# EAGLE board CT_schematic (EAGLE 7.6.0)

Size 100 x 80 mm. Coordinates in mm from the lower left corner, seen from the top.
Outline: 0,0 100,0 100,80 0,80 0,0
Copper layers (1*16): Top 0.035mm / dielectric 1.5mm / Bottom 0.035mm
Design rules "default": minimum track width 10mil, minimum drill 24mil, track to track 8mil, track to pad 8mil, pad to pad 8mil, via to via 8mil, smd to smd 8mil, copper to edge 40mil, drill to drill 8mil, minimum pad ring 10mil, minimum via ring 8mil, stop-mask expansion 4mil, vias tented up to drill 0mil, thermal gap 10mil

## Footprints (pad centres in the part's own frame; a part is rotated, then mirrored left to right if it is on the bottom)
C0603 = smd 0.8 x 0.8: 1 -0.762,0; 2 0.762,0
C0402 = smd 0.5 x 0.5: 1 -0.508,0; 2 0.508,0
C0805 = smd 1.2 x 1.3: 1 -1.016,0; 2 1.016,0
C1206 = smd 1.3 x 1.6: 1 -1.524,0; 2 1.524,0
L0603 = smd 0.8 x 0.8: 1 -0.762,0; 2 0.762,0
DR1040 = smd 1.6 x 3.2: 1 -4.458,0; 2 4.458,0
R0603 = smd 0.8 x 0.8: 1 -0.762,0; 2 0.762,0
WLCSP168 = smd 0.2 x 0.2: A1 -2.2,2.6; A2 -1.8,2.6; A3 -1.4,2.6; A4 -1,2.6; A5 -0.6,2.6; A6 -0.2,2.6; A7 0.2,2.6; A8 0.6,2.6; A9 1,2.6; A10 1.4,2.6; A11 1.8,2.6; A12 2.2,2.6; B1 -2.2,2.2; B2 -1.8,2.2; B3 -1.4,2.2; B4 -1,2.2; B5 -0.6,2.2; B6 -0.2,2.2; B7 0.2,2.2; B8 0.6,2.2; B9 1,2.2; B10 1.4,2.2; B11 1.8,2.2; B12 2.2,2.2; C1 -2.2,1.8; C2 -1.8,1.8; C3 -1.4,1.8; C4 -1,1.8; C5 -0.6,1.8; C6 -0.2,1.8; C7 0.2,1.8; C8 0.6,1.8; C9 1,1.8; C10 1.4,1.8; C11 1.8,1.8; C12 2.2,1.8; D1 -2.2,1.4; D2 -1.8,1.4; D3 -1.4,1.4; D4 -1,1.4; D5 -0.6,1.4; D6 -0.2,1.4; D7 0.2,1.4; D8 0.6,1.4; D9 1,1.4; D10 1.4,1.4; D11 1.8,1.4; D12 2.2,1.4; E1 -2.2,1; E2 -1.8,1; E3 -1.4,1; E4 -1,1; E5 -0.6,1; E6 -0.2,1; E7 0.2,1; E8 0.6,1; E9 1,1; E10 1.4,1; E11 1.8,1; E12 2.2,1; F1 -2.2,0.6; F2 -1.8,0.6; F3 -1.4,0.6; F4 -1,0.6; F5 -0.6,0.6; F6 -0.2,0.6; F7 0.2,0.6; F8 0.6,0.6; F9 1,0.6; F10 1.4,0.6; F11 1.8,0.6; F12 2.2,0.6; G1 -2.2,0.2; G2 -1.8,0.2; G3 -1.4,0.2; G4 -1,0.2; G5 -0.6,0.2; G6 -0.2,0.2; G7 0.2,0.2; G8 0.6,0.2; G9 1,0.2; G10 1.4,0.2; G11 1.8,0.2; G12 2.2,0.2; H1 -2.2,-0.2; H2 -1.8,-0.2; H3 -1.4,-0.2; H4 -1,-0.2; H5 -0.6,-0.2; H6 -0.2,-0.2; H7 0.2,-0.2; H8 0.6,-0.2; H9 1,-0.2; H10 1.4,-0.2; H11 1.8,-0.2; H12 2.2,-0.2; J1 -2.2,-0.6; J2 -1.8,-0.6; J3 -1.4,-0.6; J4 -1,-0.6; J5 -0.6,-0.6; J6 -0.2,-0.6; J7 0.2,-0.6; J8 0.6,-0.6; J9 1,-0.6; J10 1.4,-0.6; J11 1.8,-0.6; J12 2.2,-0.6; K1 -2.2,-1; K2 -1.8,-1; K3 -1.4,-1; K4 -1,-1; K5 -0.6,-1; K6 -0.2,-1; K7 0.2,-1; K8 0.6,-1; K9 1,-1; K10 1.4,-1; K11 1.8,-1; K12 2.2,-1; L1 -2.2,-1.4; L2 -1.8,-1.4; L3 -1.4,-1.4; L4 -1,-1.4; L5 -0.6,-1.4; L6 -0.2,-1.4; L7 0.2,-1.4; L8 0.6,-1.4; L9 1,-1.4; L10 1.4,-1.4; L11 1.8,-1.4; L12 2.2,-1.4; M1 -2.2,-1.8; M2 -1.8,-1.8; M3 -1.4,-1.8; M4 -1,-1.8; M5 -0.6,-1.8; M6 -0.2,-1.8; M7 0.2,-1.8; M8 0.6,-1.8; M9 1,-1.8; M10 1.4,-1.8; M11 1.8,-1.8; M12 2.2,-1.8; N1 -2.2,-2.2; N2 -1.8,-2.2; N3 -1.4,-2.2; N4 -1,-2.2; N5 -0.6,-2.2; N6 -0.2,-2.2; N7 0.2,-2.2; N8 0.6,-2.2; N9 1,-2.2; N10 1.4,-2.2; N11 1.8,-2.2; N12 2.2,-2.2; P1 -2.2,-2.6; P2 -1.8,-2.6; P3 -1.4,-2.6; P4 -1,-2.6; P5 -0.6,-2.6; P6 -0.2,-2.6; P7 0.2,-2.6; P8 0.6,-2.6; P9 1,-2.6; P10 1.4,-2.6; P11 1.8,-2.6; P12 2.2,-2.6
DFN8-S = smd 0.6 x 0.4: 1 -2.69,1.905; 2 -2.69,0.635; 3 -2.69,-0.635; 4 -2.69,-1.905; 5 2.69,-1.905; 6 2.69,-0.635; 7 2.69,0.635; 8 2.69,1.905
VFBGA-63 = smd 0.4 x 0.4: A1 -3.6,4.4; A2 -2.8,4.4; A9 2.8,4.4; A10 3.6,4.4; B1 -3.6,3.6; B9 2.8,3.6; B10 3.6,3.6; C3 -2,2.8; C4 -1.2,2.8; C5 -0.4,2.8; C6 0.4,2.8; C7 1.2,2.8; C8 2,2.8; D3 -2,2; D4 -1.2,2; D5 -0.4,2; D6 0.4,2; D7 1.2,2; D8 2,2; E3 -2,1.2; E4 -1.2,1.2; E5 -0.4,1.2; E6 0.4,1.2; E7 1.2,1.2; E8 2,1.2; F3 -2,0.4; F4 -1.2,0.4; F5 -0.4,0.4; F6 0.4,0.4; F7 1.2,0.4; F8 2,0.4; G3 -2,-0.4; G4 -1.2,-0.4; G5 -0.4,-0.4; G6 0.4,-0.4; G7 1.2,-0.4; G8 2,-0.4; H3 -2,-1.2; H4 -1.2,-1.2; H5 -0.4,-1.2; H6 0.4,-1.2; H7 1.2,-1.2; H8 2,-1.2; J3 -2,-2; J4 -1.2,-2; J5 -0.4,-2; J6 0.4,-2; J7 1.2,-2; J8 2,-2; K3 -2,-2.8; K4 -1.2,-2.8; K5 -0.4,-2.8; K6 0.4,-2.8; K7 1.2,-2.8; K8 2,-2.8; L1 -3.6,-3.6; L2 -2.8,-3.6; L9 2.8,-3.6; L10 3.6,-3.6; M1 -3.6,-4.4; M2 -2.8,-4.4; M9 2.8,-4.4; M10 3.6,-4.4
FCI_10118193-0001LF = smd 0.4 x 1.35: 1 -1.3,2.675; 2 -0.65,2.675; 3 0,2.675; 4 0.65,2.675; 5 1.3,2.675 | smd 1.6 x 1.4: 6 -3.2,2.45; 7 3.2,2.45 | smd 1.9 x 1.9: 8 -1.2,0; 9 1.2,0 | hole 0.5: -3.3,0; 3.3,0
SOT143B = smd 1 x 0.7: 1 -0.75,-1 | smd 0.6 x 0.7: 2 0.95,-1; 3 0.95,1; 4 -0.95,1
ABS07-32.768KHZ-7-T = smd 1.1 x 2.4: 1 -2.5,0; 2 0,0
ASFL1 = smd 1.7 x 1.5: 1 -1.27,-1.1; 2 1.27,-1.1; 3 1.27,1.1; 4 -1.27,1.1
TSOT-23-5 = smd 1.3 x 0.62: 1 -1.31,0.95; 2 -1.31,0; 3 -1.31,-0.95; 4 1.31,-0.95; 5 1.31,0.95
DFN8_2X3MC = smd 0.813 x 0.305: 1 -1.398,0.75; 2 -1.398,0.25; 3 -1.398,-0.25; 4 -1.398,-0.75; 5 1.398,-0.75; 6 1.398,-0.25; 7 1.398,0.25; 8 1.398,0.75 | smd 1.753 x 1.549: 9 0,0
JST-2-SMD = smd 1 x 4.6: 1 -1,-3.7; 2 1,-3.7 | smd 1.6 x 3.4: NC1 -3.4,1.5; NC2 3.4,1.5
SON-6 = smd 0.55 x 0.3: 1 -0.355,0.5 | smd 0.52 x 0.3: 2 -0.37,0; 3 -0.37,-0.5; 4 0.37,-0.5; 5 0.37,0; 6 0.37,0.5
SW_4-1437565-2 = smd 1.4 x 2.1: 1 -2.23,4.55; 2 -2.23,-4.55; 3 2.23,4.55; 4 2.23,-4.55
LGM67K-G1J2-24-Z = smd 0.8 x 1.4: A -2,0; C 0,0
NC7SZ125M5X = smd 1.3 x 0.7: 1 -1.3,0.95; 2 -1.3,0; 3 -1.3,-0.95; 4 1.3,-0.95; 5 1.3,0.95
DUMMY_PACKAGE_165 = drill 0.3: 1 0,-1; 2 1.5,-1; 3 3,-1

## Placement (x,y rotation side)
C1  1e-06  [C0603]  -64.77,48.26 0 top  (outside the outline)
C2  1e-07  [C0603]  -15.24,53.34 0 top  (outside the outline)
C3  1e-07  [C0603]  -19.05,53.34 0 top  (outside the outline)
C4  1e-07  [C0603]  -22.86,53.34 0 top  (outside the outline)
C5  1e-07  [C0603]  -26.67,53.34 0 top  (outside the outline)
C6  1e-07  [C0603]  -30.48,53.34 0 top  (outside the outline)
C7  1e-07  [C0603]  -34.29,53.34 0 top  (outside the outline)
C8  1e-07  [C0603]  -38.1,53.34 0 top  (outside the outline)
C9  1e-07  [C0603]  -41.91,53.34 0 top  (outside the outline)
C10  1e-07  [C0603]  -45.72,53.34 0 top  (outside the outline)
C11  1e-07  [C0603]  -49.53,53.34 0 top  (outside the outline)
C12  4.7e-06  [C0603]  -49.53,48.26 0 top  (outside the outline)
C13  2.2e-06  [C0603]  -53.34,48.26 0 top  (outside the outline)
C14  2.2e-06  [C0603]  -57.15,48.26 0 top  (outside the outline)
C15  1e-08  [C0603]  -53.34,53.34 0 top  (outside the outline)
C16  1e-06  [C0603]  -57.15,53.34 0 top  (outside the outline)
C17  1e-07  [C0603]  -60.96,53.34 0 top  (outside the outline)
C18  1e-11  [C0402]  -41.91,58.42 0 top  (outside the outline)
C19  1e-11  [C0402]  -45.72,58.42 0 top  (outside the outline)
C20  1e-06  [C0603]  -64.77,53.34 0 top  (outside the outline)
C21  1e-08  [C0402]  -49.53,58.42 0 top  (outside the outline)
C22  1e-07  [C0402]  -53.34,58.42 0 top  (outside the outline)
C23  1e-07  [C0402]  -57.15,58.42 0 top  (outside the outline)
C24  1e-07  [C0402]  -60.96,58.42 0 top  (outside the outline)
C25  1e-07  [C0402]  -64.77,58.42 0 top  (outside the outline)
C26  2.2e-06  [C0603]  -60.96,48.26 0 top  (outside the outline)
C27  1e-08  [C0402]  -15.24,63.5 0 top  (outside the outline)
C28  1e-05  [C0805]  -46.99,36.83 0 top  (outside the outline)
C29  1e-05  [C0805]  -52.07,36.83 0 top  (outside the outline)
C30  1e-07  [C0402]  -19.05,63.5 0 top  (outside the outline)
C31  1e-05  [C1206]  -29.21,36.83 0 top  (outside the outline)
C32  1e-05  [C1206]  -35.56,36.83 0 top  (outside the outline)
C33  1e-08  [C0402]  -22.86,63.5 0 top  (outside the outline)
F1  240.0  [L0603]  -15.24,58.42 0 top  (outside the outline)
I1  2.5e-06  [DR1040]  -48.26,6.35 0 top  (outside the outline)
R2  1000.0  [R0603]  -19.05,58.42 0 top  (outside the outline)
R4  4700.0  [R0603]  -22.86,58.42 0 top  (outside the outline)
R5  2200.0  [R0603]  -26.67,58.42 0 top  (outside the outline)
R6  2200.0  [R0603]  -30.48,58.42 0 top  (outside the outline)
R7  10000.0  [R0603]  -30.48,43.18 0 top  (outside the outline)
R8  10000.0  [R0603]  -35.56,43.18 0 top  (outside the outline)
R9  10000.0  [R0603]  -40.64,43.18 0 top  (outside the outline)
R10  10000.0  [R0603]  -45.72,43.18 0 top  (outside the outline)
R11  10000.0  [R0603]  -50.8,43.18 0 top  (outside the outline)
R12  10000.0  [R0603]  -55.88,43.18 0 top  (outside the outline)
R13  10000.0  [R0603]  -60.96,43.18 0 top  (outside the outline)
R14  10000.0  [R0603]  -15.24,48.26 0 top  (outside the outline)
R15  10000.0  [R0603]  -20.32,48.26 0 top  (outside the outline)
R16  10000.0  [R0603]  -25.4,48.26 0 top  (outside the outline)
R17  10000.0  [R0603]  -30.48,48.26 0 top  (outside the outline)
R18  220000.0  [R0603]  -15.24,43.18 0 top  (outside the outline)
R19  1000000.0  [R0603]  -64.77,35.56 0 top  (outside the outline)
R20  10000.0  [R0603]  -35.56,48.26 0 top  (outside the outline)
R21  10000.0  [R0603]  -40.64,48.26 0 top  (outside the outline)
R22  9100.0  [R0603]  -34.29,58.42 0 top  (outside the outline)
R23  680000.0  [R0603]  -20.32,43.18 0 top  (outside the outline)
R24  120000.0  [R0603]  -25.4,43.18 0 top  (outside the outline)
R25  2000.0  [R0603]  -38.1,58.42 0 top  (outside the outline)
R26  10000.0  [R0603]  -45.72,48.26 0 top  (outside the outline)
U1  STM32F469AIY6TR  [WLCSP168]  -26.67,19.05 0 top  (outside the outline)
U2  24AA512-I/MF  [DFN8-S]  -55.88,19.05 0 top  (outside the outline)
U3  mt29f4g08abadah4  [VFBGA-63]  -17.78,6.35 0 top  (outside the outline)
U4  10118193-0001LF  [FCI_10118193-0001LF]  -35.56,27.94 0 top  (outside the outline)
U5  prtr5v0u2ax  [SOT143B]  -35.56,63.5 0 top  (outside the outline)
U6  ABS07-32.768KHZ-7-T  [ABS07-32.768KHZ-7-T]  -55.88,27.94 0 top  (outside the outline)
U7  ASFL1-25MHZ-NCS  [ASFL1]  -26.67,29.21 0 top  (outside the outline)
U8  ltc3406es5  [TSOT-23-5]  -57.15,35.56 0 top  (outside the outline)
U9  MCP73831T-2ACI/MC  [DFN8_2X3MC]  -50.8,62.23 0 top  (outside the outline)
U10  S2B-PH-SM4-TB(LF)(SN)  [JST-2-SMD]  -40.64,19.05 0 top  (outside the outline)
U11  TPS3895ADRYR  [SON-6]  -44.45,62.23 0 top  (outside the outline)
U12  4-1437565-2  [SW_4-1437565-2]  -38.1,6.35 0 top  (outside the outline)
U13  Q65110A2395  [LGM67K-G1J2-24-Z]  -17.78,36.83 0 top  (outside the outline)
U14  nc7sz125m5x  [NC7SZ125M5X]  -40.64,35.56 0 top  (outside the outline)
U15  Dummy  [DUMMY_PACKAGE_165]  -41.91,63.5 0 top  (outside the outline)

## Library data of the parts
C1-C33 F1 I1 R2 R4-R26 U1-U15 = circuit_tree

## Nets
CLK_CRYSTAL_U1_E11: C18.1 U1.E11 U6.1
CLK_CRYSTAL_U1_E12: C19.1 U1.E12 U6.2
CLK_U1_K11: U1.K11 U7.3
GND: C1.2 C2.2 C3.2 C4.2 C5.2 C6.2 C7.2 C8.2 C9.2 C10.2 C11.2 C12.2 C13.2 C14.2 C15.2 C16.2 C17.2 C18.2 C19.2 C20.2 C21.2 C22.2 C23.2 C24.2 C25.2 C26.2 C27.2 C28.2 C29.1 C29.2 C30.2 C31.2 C32.2 C33.2 R2.2 R9.2 R10.2 R11.2 R18.2 R22.2 R24.2 R25.2 U1.A4 U1.B7 U1.B10 U1.C1 U1.F2 U1.F7 U1.F12 U1.H1 U1.H7 U1.J11 U1.L11 U1.M1 U1.N8 U1.N11 U1.P4 U2.4 U3.C5 U3.F7 U3.K3 U3.K8 U4.5 U4.6 U4.7 U4.8 U4.9 U5.1 U7.2 U8.2 U9.6 U9.9 U10.2 U11.2 U13.C U14.1 U14.3 U15.1
INPUT_USBPOWER_5V: C20.1 C31.1 R26.2 U1.E2 U4.1 U5.4 U9.1 U9.2
NET_U1_A9: R6.1 U1.A9 U2.5
NET_U1_B9: R5.1 U1.B9 U2.6
NET_U1_D2: C14.1 U1.D2
NET_U1_D9: R7.1 U1.D9
NET_U1_F8: R8.1 U1.F8
NET_U1_H9: R4.1 U1.H9 U14.4
NET_U1_K1: U1.K1
NET_U1_K2: U1.K2
NET_U1_M12: C15.1 C16.1 F1.1 U1.M12
NET_U1_N4: C13.1 U1.N4
NET_U1_P9: R9.1 U1.P9
NET_U1_P10: U13.A
NET_U1_P11: U12.3 U12.4
NET_U2_1: R10.1 U2.1
NET_U2_2: R11.1 U2.2
NET_U2_3: R12.1 U2.3
NET_U3_C3: R17.1 U3.C3
NET_U8_1: U8.1
NET_U8_3: I1.1 U8.3
NET_U8_5: R18.1 R19.1 U8.5
NET_U8_ATNET_3: I1.2 R19.2
NET_U9_5: R26.1 U9.5
NET_U9_8: R25.1 U9.8
NET_U11_1: R21.1 R22.1 U11.1
NET_U11_3: R23.2 R24.1 U11.3
NET_U11_4: R20.1 U11.4 U14.2
NET_U12_1: R2.1 U12.1 U12.2
PROC_ADC1_IN3: U1.N10 U15.2
PROC_ADC1_IN4: U1.M9 U15.3
PROC_FMC_A16: U1.J4 U3.D5
PROC_FMC_A17: U1.M2 U3.C4
PROC_FMC_D0: U1.L3 U3.H4
PROC_FMC_D1: U1.L2 U3.J4
PROC_FMC_D2: U1.E6 U3.K4
PROC_FMC_D3: U1.A3 U3.K5
PROC_FMC_D4: U1.N7 U3.K6
PROC_FMC_D5: U1.M7 U3.J7
PROC_FMC_D6: U1.K6 U3.K7
PROC_FMC_D7: U1.P6 U3.J8
PROC_FMC_INT: R13.1 U1.H6 U3.C8
PROC_FMC_NCE: R14.1 U1.D7 U3.C6
PROC_FMC_NOE: R16.1 U1.B4 U3.D4
PROC_FMC_NWE: R15.1 U1.C6 U3.C7
PROC_USB_OTG_FS_DM: U1.F7 U4.2 U5.3
PROC_USB_OTG_FS_DP: U1.F6 U4.3 U5.2
VCC_S1_3V7: C28.1 C32.1 U8.4 U9.3 U9.4 U10.1
VCC_TIER1_3V3: C1.1 C2.1 C3.1 C4.1 C5.1 C6.1 C7.1 C8.1 C9.1 C10.1 C11.1 C12.1 C17.1 C21.1 C22.1 C23.1 C24.1 C25.1 C26.1 C27.1 C29.2 C30.1 C33.1 F1.2 I1.2 R4.2 R5.2 R6.2 R7.2 R8.2 R12.2 R13.2 R14.2 R15.2 R16.2 R17.2 R19.2 R20.2 R21.2 R23.1 U1.A7 U1.A11 U1.B5 U1.C2 U1.C12 U1.F1 U1.G11 U1.J12 U1.L1 U1.P3 U1.P8 U1.P12 U2.7 U2.8 U3.D3 U3.G4 U3.H8 U3.J6 U7.4 U11.6 U14.5

## Tracks (layer width: path | path; a pad name or v marks a point on that pad's centre or on a via)
CLK_CRYSTAL_U1_E11  (2 unrouted)
CLK_CRYSTAL_U1_E12  (2 unrouted)
CLK_U1_K11  (1 unrouted)
GND  (77 unrouted)
INPUT_USBPOWER_5V  (7 unrouted)
NET_U1_A9  (2 unrouted)
NET_U1_B9  (2 unrouted)
NET_U1_D2  (1 unrouted)
NET_U1_D9  (1 unrouted)
NET_U1_F8  (1 unrouted)
NET_U1_H9  (2 unrouted)
NET_U1_M12  (3 unrouted)
NET_U1_N4  (1 unrouted)
NET_U1_P9  (1 unrouted)
NET_U1_P11  (1 unrouted)
NET_U2_1  (1 unrouted)
NET_U2_2  (1 unrouted)
NET_U2_3  (1 unrouted)
NET_U3_C3  (1 unrouted)
NET_U8_3  (1 unrouted)
NET_U8_5  (2 unrouted)
NET_U8_ATNET_3  (1 unrouted)
NET_U9_5  (1 unrouted)
NET_U9_8  (1 unrouted)
NET_U11_1  (2 unrouted)
NET_U11_3  (2 unrouted)
NET_U11_4  (2 unrouted)
NET_U12_1  (2 unrouted)
PROC_ADC1_IN3  (1 unrouted)
PROC_ADC1_IN4  (1 unrouted)
PROC_FMC_A16  (1 unrouted)
PROC_FMC_A17  (1 unrouted)
PROC_FMC_D0  (1 unrouted)
PROC_FMC_D1  (1 unrouted)
PROC_FMC_D2  (1 unrouted)
PROC_FMC_D3  (1 unrouted)
PROC_FMC_D4  (1 unrouted)
PROC_FMC_D5  (1 unrouted)
PROC_FMC_D6  (1 unrouted)
PROC_FMC_D7  (1 unrouted)
PROC_FMC_INT  (2 unrouted)
PROC_FMC_NCE  (2 unrouted)
PROC_FMC_NOE  (2 unrouted)
PROC_FMC_NWE  (2 unrouted)
PROC_USB_OTG_FS_DM  (2 unrouted)
PROC_USB_OTG_FS_DP  (2 unrouted)
VCC_S1_3V7  (5 unrouted)
VCC_TIER1_3V3  (60 unrouted)